# Altium PCB 220,small.PcbDoc
Units mm, origin at the board's own origin, x right, y up, seen from the top; angles counter-clockwise.
Board outline 47.6 x 42.6 mm, 4 copper layers (Top Layer, Internal Plane 1, Internal Plane 2, Bottom Layer); 43 components, 27 nets, 106 pads, 2 vias.
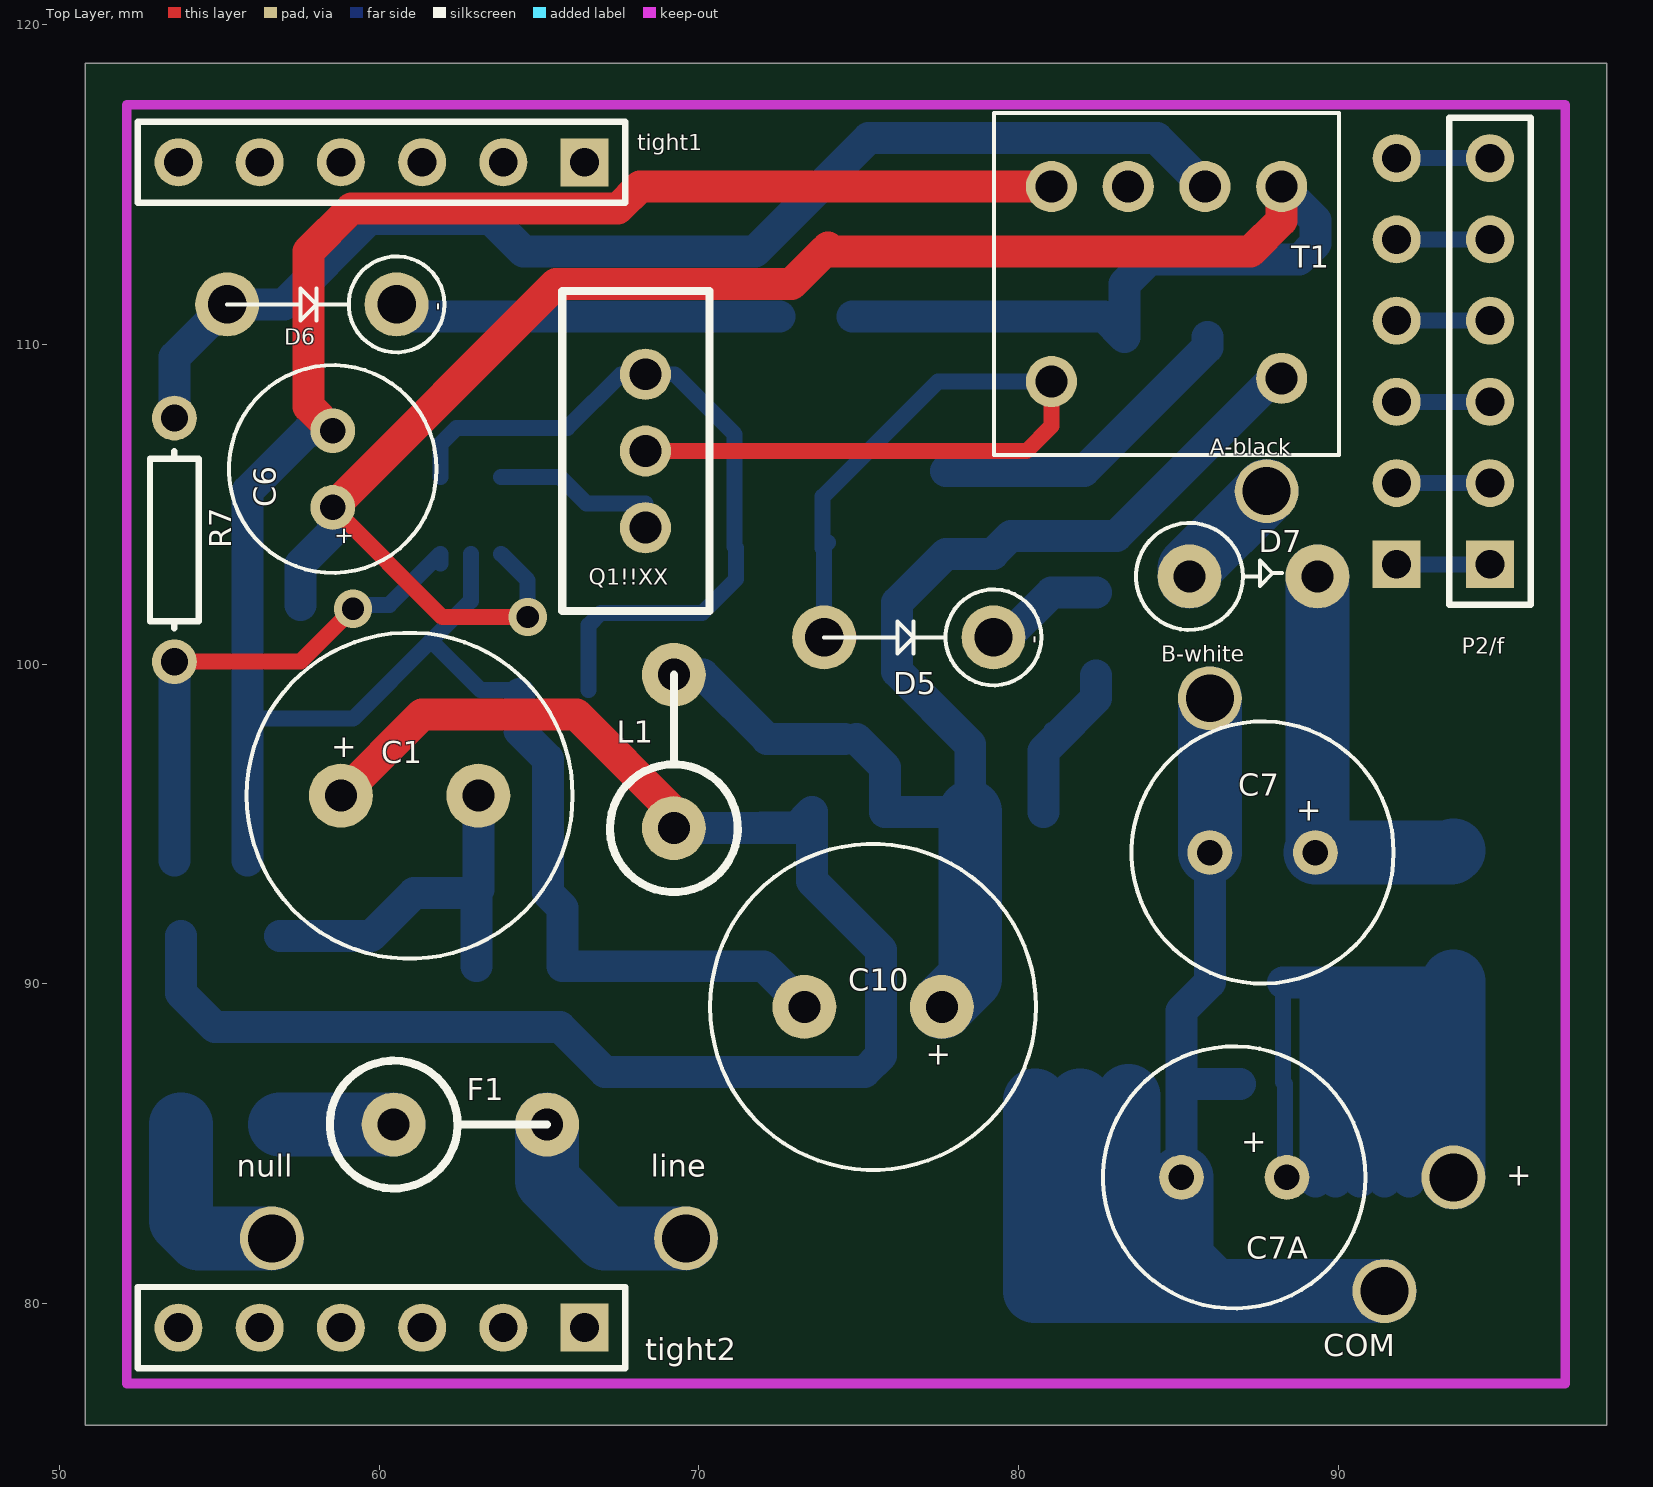
[diagram p0: Top Layer view]
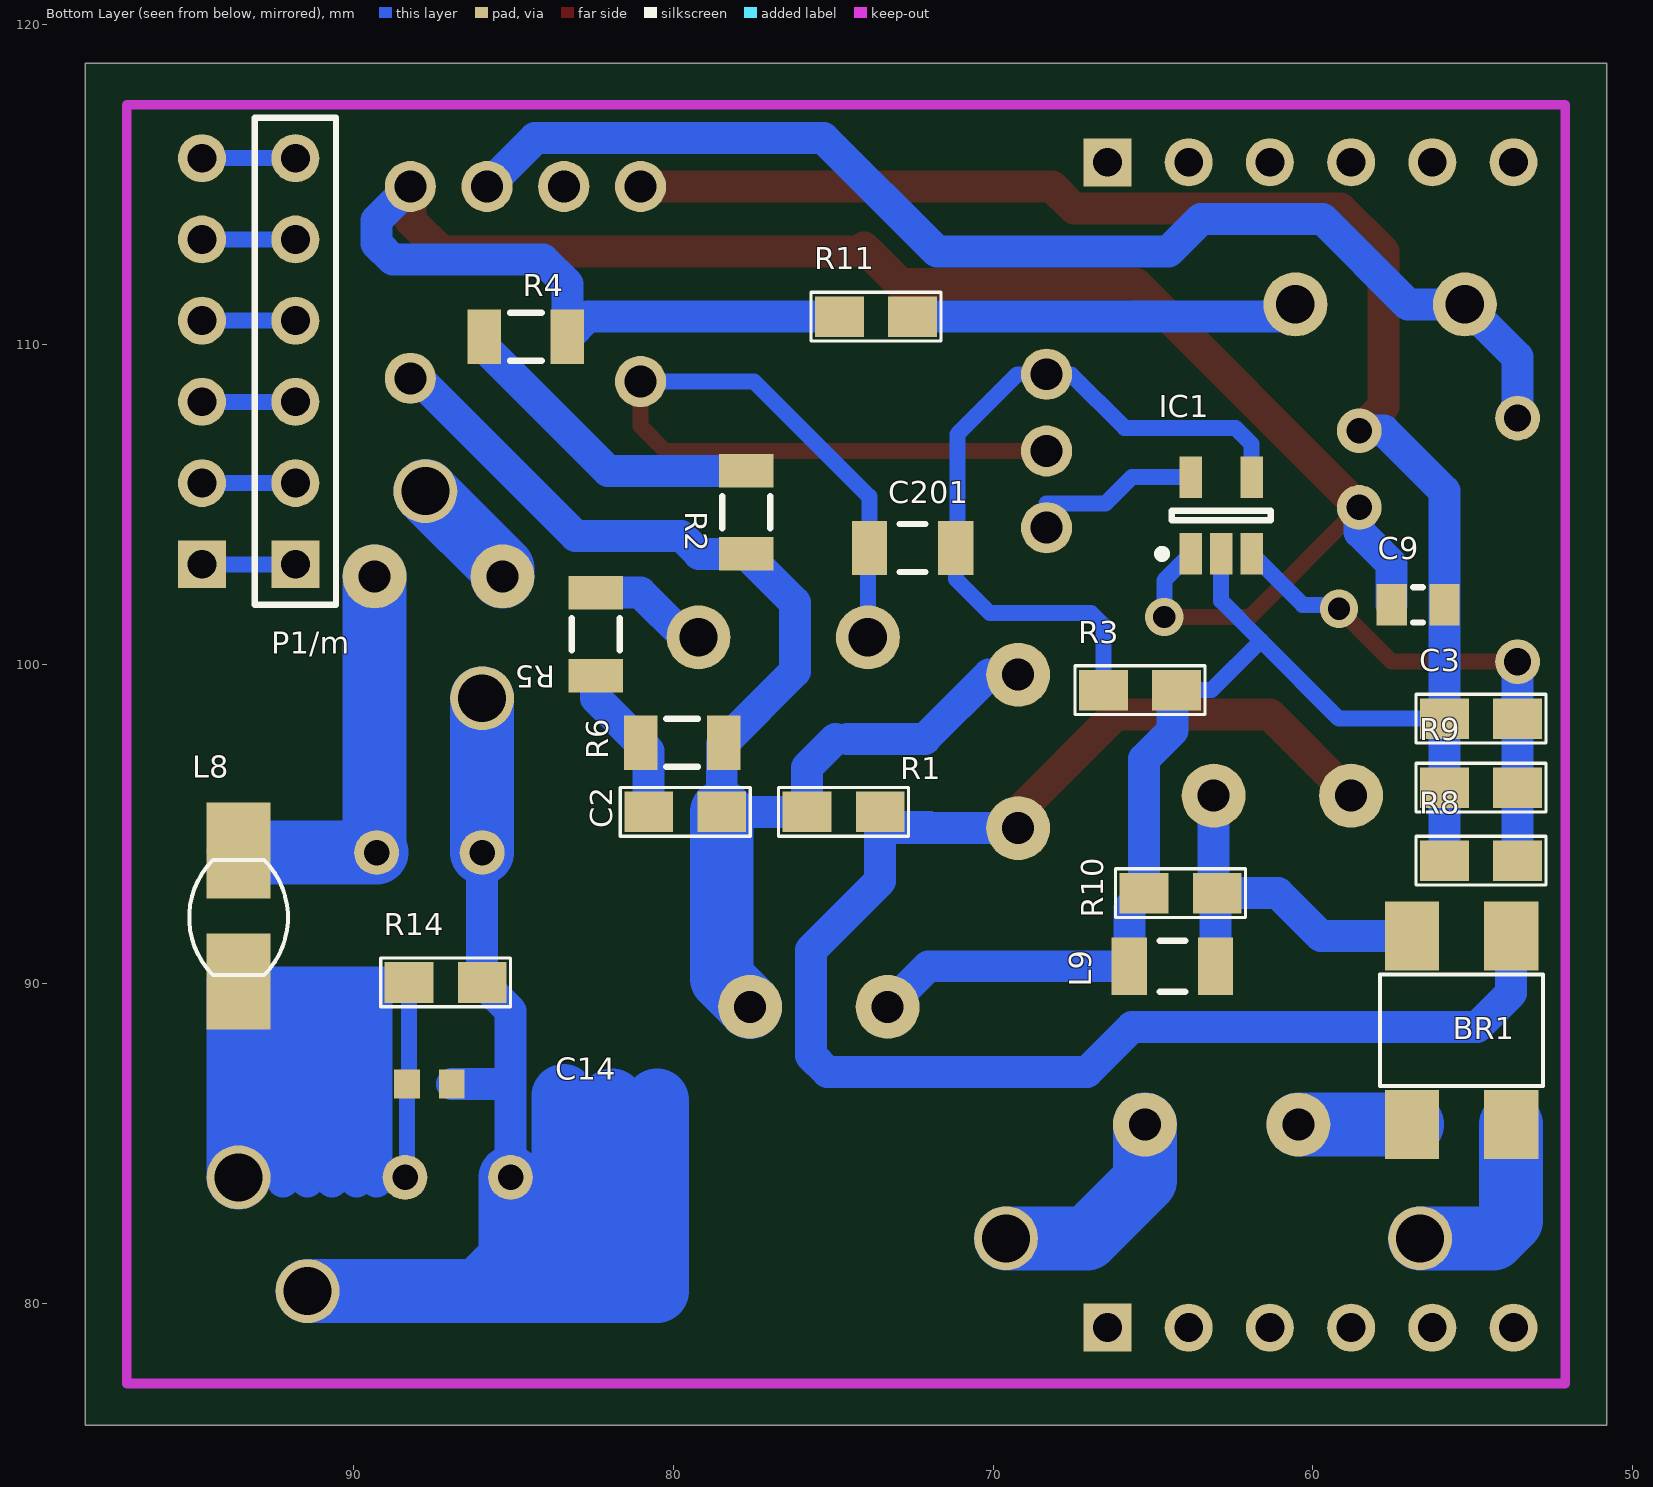
[diagram p1: Bottom Layer view, seen from below]
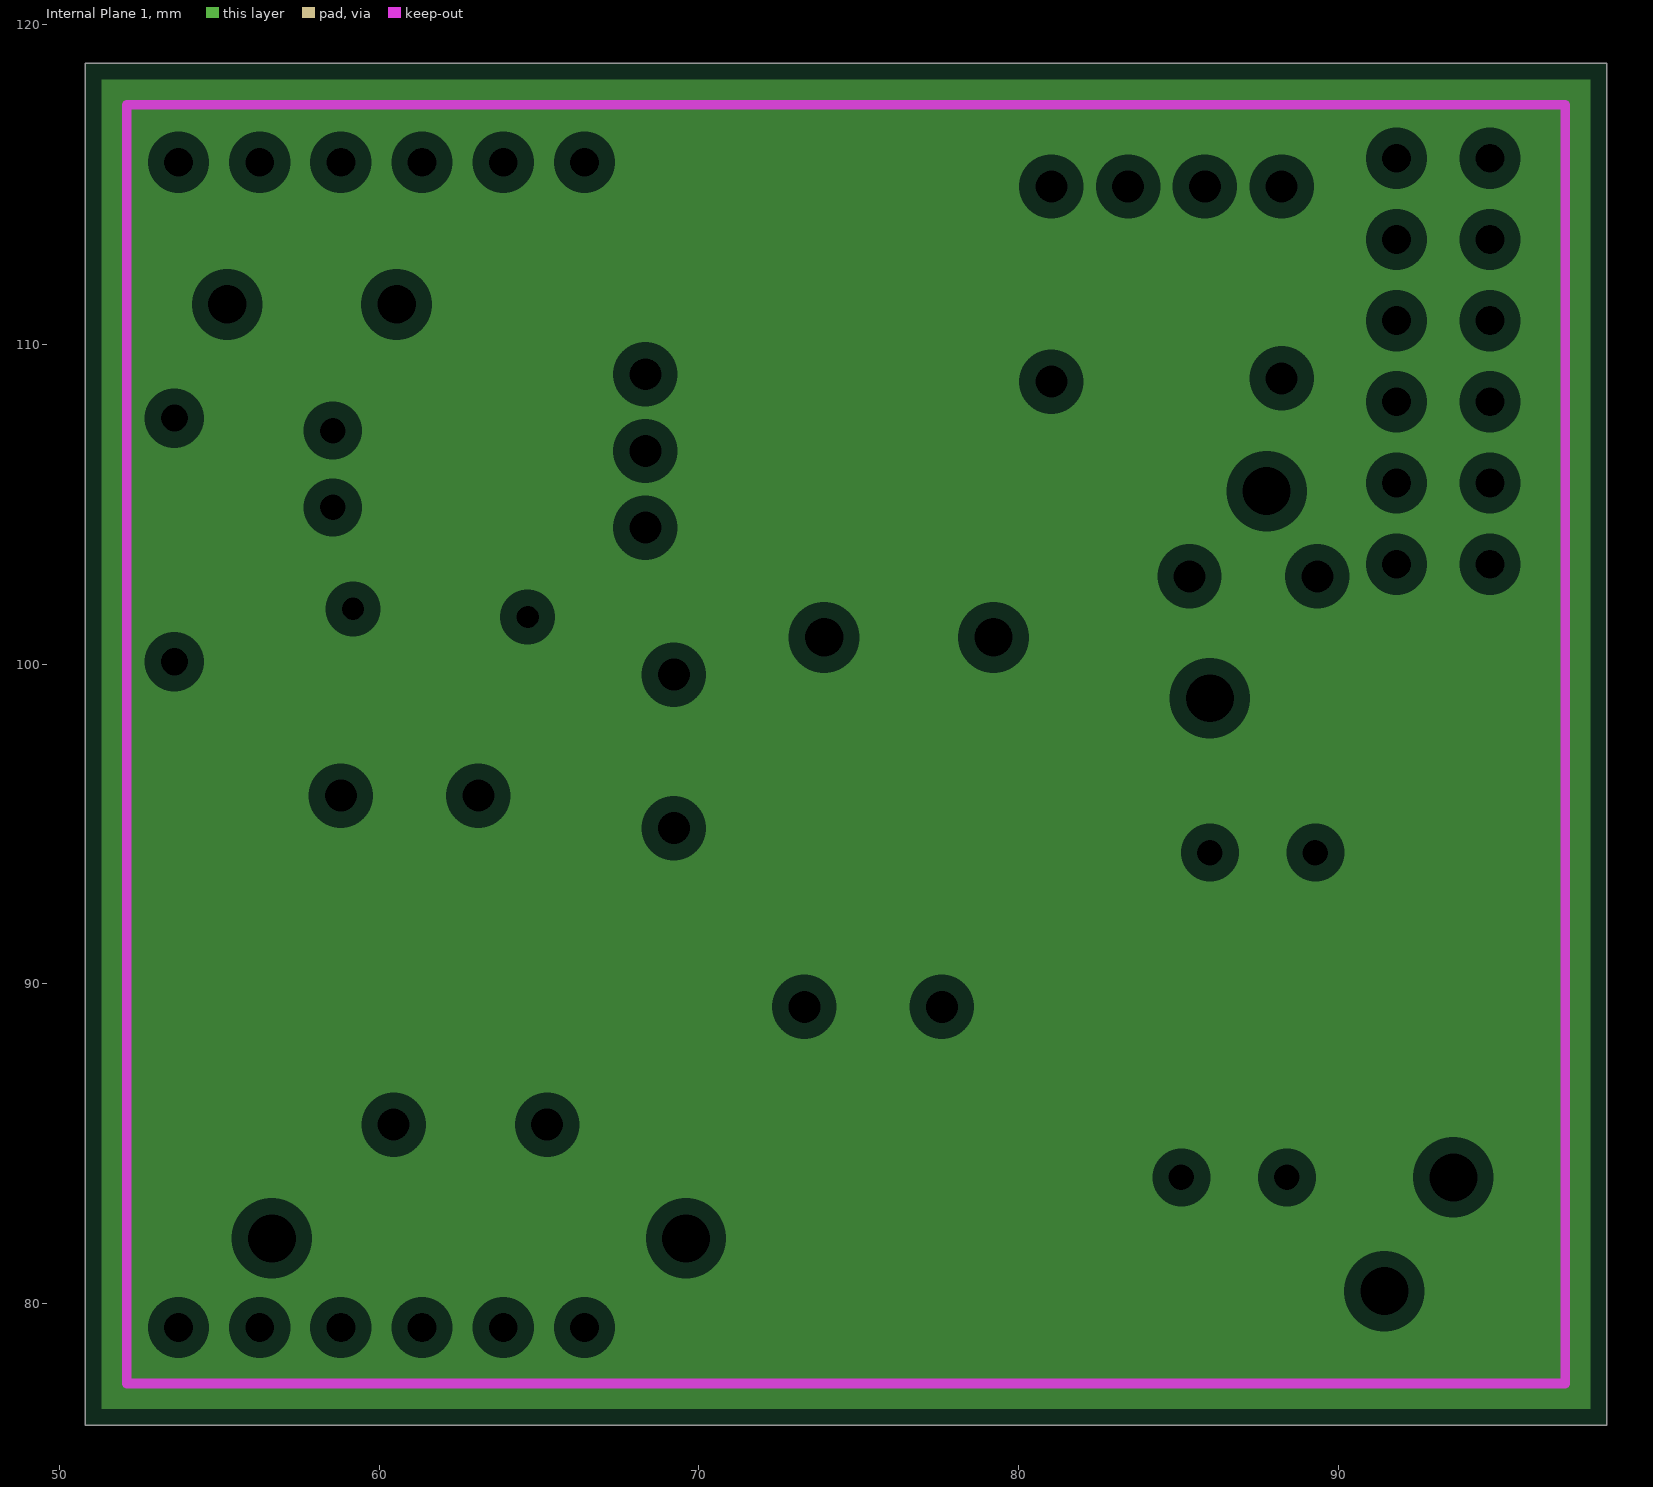
[diagram p2: Internal Plane 1, clearances drawn from the general rule]
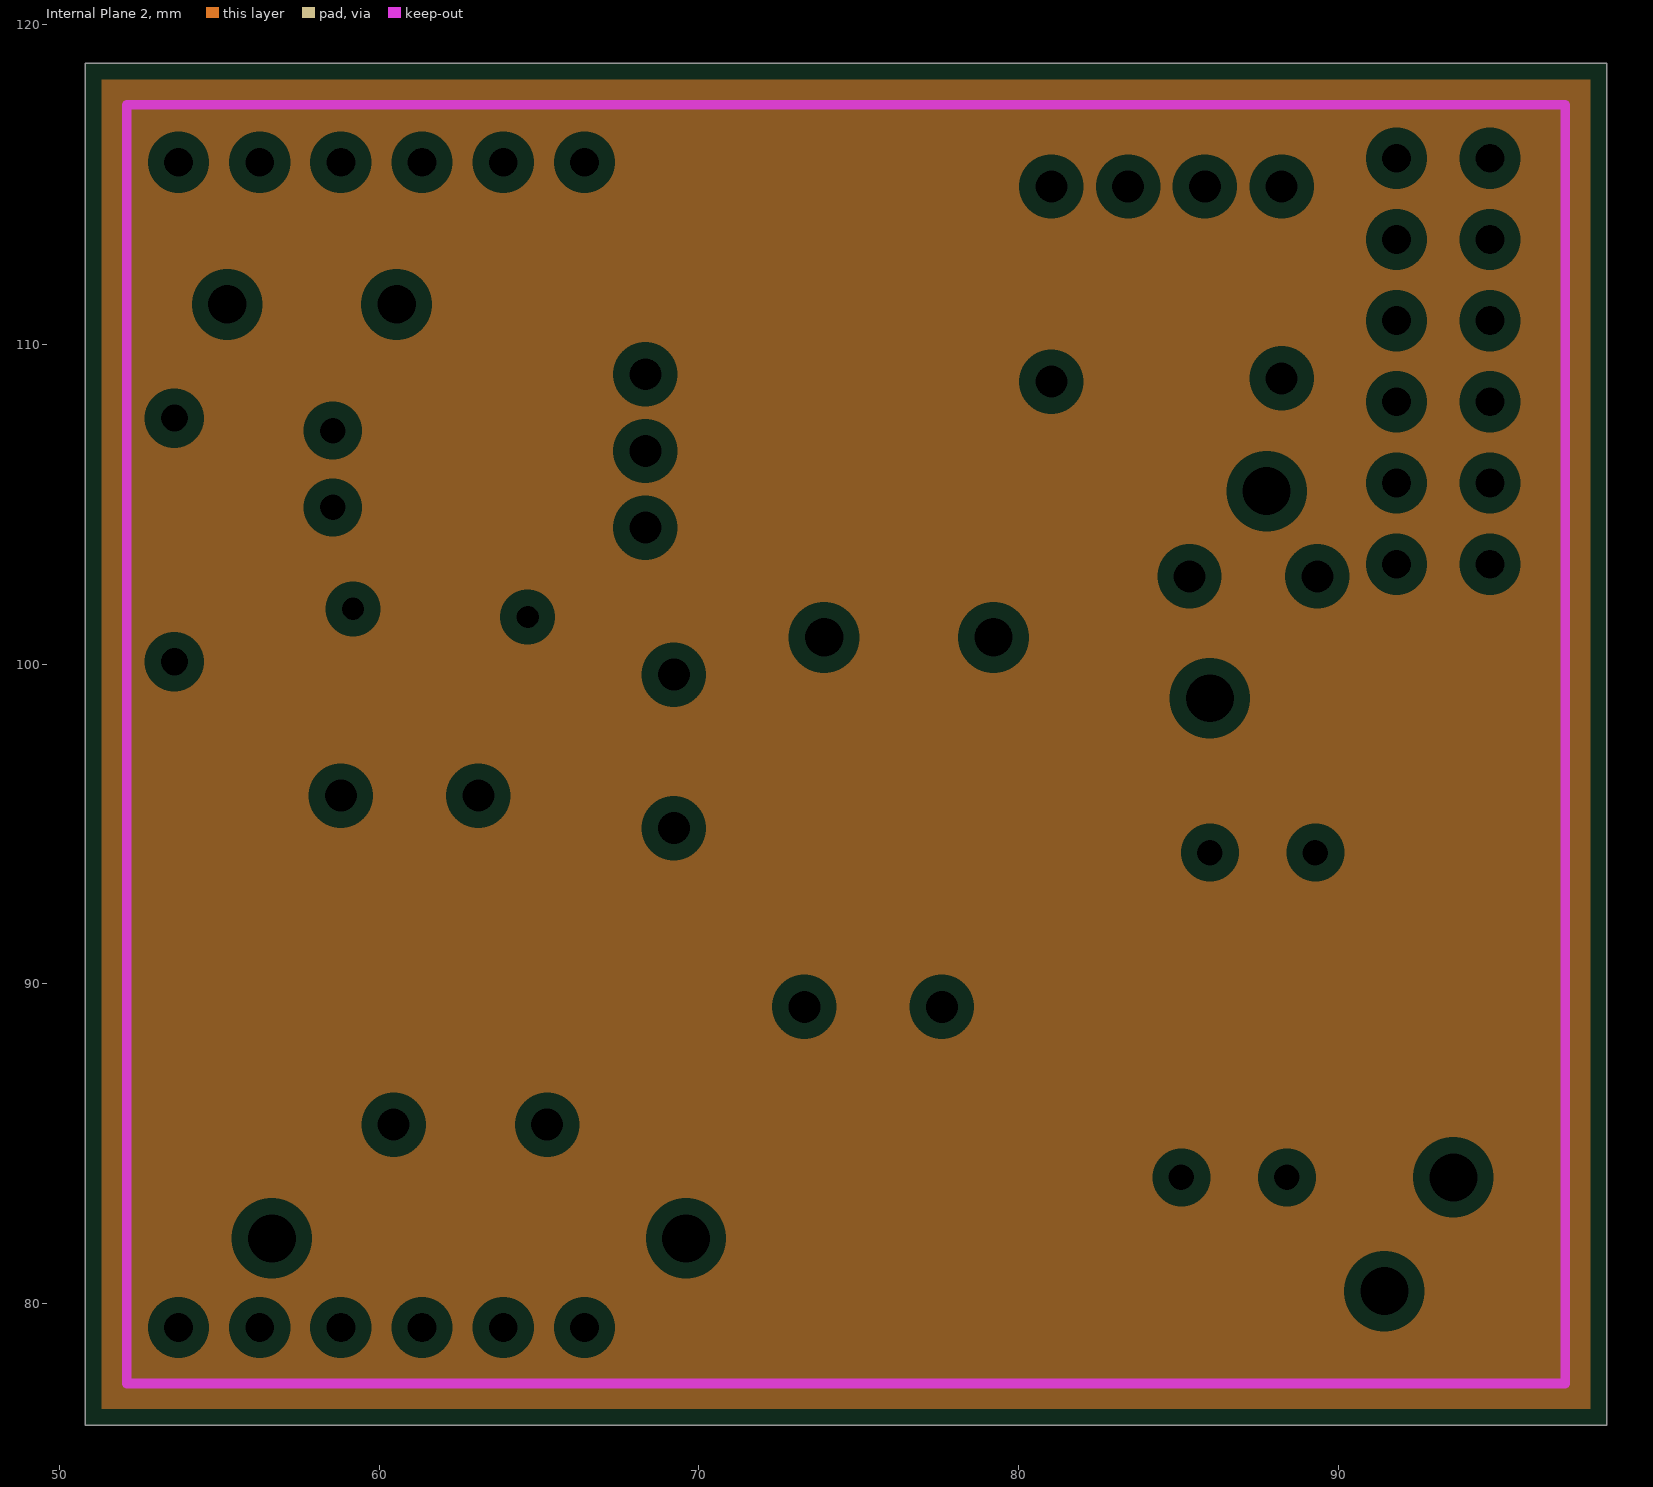
[diagram p3: Internal Plane 2, clearances drawn from the general rule]

## Layer stack, top to bottom
Top Layer: signal copper 0.0356
Dielectric: dielectric 0.32, FR-4, Dk 4.8
Internal Plane 1: plane copper 0.0356
Dielectric: dielectric 0.32, FR-4, Dk 4.8
Internal Plane 2: plane copper 0.0356
Dielectric: dielectric 0.32, FR-4, Dk 4.8
Bottom Layer: signal copper 0.0356

## Board outline
50.8,76.2 98.4,76.2 98.4,118.8 50.8,118.8

## Design rules (kind name [scope] priority, off if disabled: settings)
Clearance [All] p1: gap=0.2
PlaneClearance [All] p1: clearance=0.508
PlaneConnect [All] p1: planeconnectstyle=Relief reliefexpansion=0.508 reliefentries=4 reliefconductorwidth=0.254 reliefairgap=0.254
PolygonConnect [All] p1: connectstyle=Relief reliefconductorwidth=0.254 reliefentries=4 polygonreliefangle="90 Angle"
RoomDefinition 220,small [InComponentClass('220,small')] p1: confinementstyle=ConfineIn formatcopy=TRUE lockcomponents=FALSE outline 0,0 50.8,0 50.8,25.4 0,25.4
RoutingVias [All] p1: holewidth=0.7 width=1.2 viastyle="Through Hole" minholewidth=0.711 minwidth=1.27 maxholewidth=0.711 maxwidth=1.27
SilkscreenOverComponentPads [All] p1: minsilkscreentomaskgap=0.254
SolderMaskExpansion [All] p1: expansion=0.102
Width [All] p1: maxlimit=3 minlimit=0.2 preferedwidth=0.5
25 further rules are at their usual default settings.

## Components (designator, comment, footprint, x,y, rotation, side; value= is the part's Value field where it differs from the comment)
+ "hole-pin" holepin 93.599,83.947 r0 top
A-black "hole-pin" holepin 87.757,105.41 r90 top
B-white "hole-pin" holepin 85.979,98.933 r90 top
BR1 "Bridge" MB108 56.896,85.598 r180 bottom
C1 "15u-400V" 15u-400V 58.801,95.885 r0 top
C2 "CAP" 805 77.597,96.139 r0 bottom
C3 "CAP" 805 56.769,97.536 r180 bottom
C6 "cap-47u-50V" cap47 58.547,104.902 r90 top
C7 "470u-10V" 470u-10V 89.281,94.107 r180 top
C7A "470u-10V" 470u-10V 88.392,83.947 r180 top
C9 "" SMD_CAP_0805 57.531,101.854 r180 bottom
C10 "15u-400V" 15u-400V 77.597,89.281 r180 top
C14 "Cap Semi" 1608[0603] 87.63,86.868 r0 bottom
C201 "Cap Semi" C1206 72.517,103.632 r0 bottom
COM "hole-pin" holepin 91.44,80.391 r0 top
D5 "diode" diode 73.914,100.838 r90 top
D6 "diode" diode 55.245,111.252 r90 top
D7 "Diode" SB340s 85.344,102.743 r0 top
F1 "fuse-R" fuse_r 60.452,85.598 r90 top
IC1 "Ic in sw supply small(1A17?)" SOT23-5AM 62.865,104.648 r90 bottom
L1 "470uH" fuse_r 69.215,94.869 r180 top
L8 "1R0=1uH" self 93.599,92.075 r270 bottom
L9 "Inductor" INDC3216 64.389,90.551 r0 bottom
line "hole-pin" hole-pin 69.596,82.042 r0 top
null "hole-pin" hole-pin 56.642,82.042 r0 top
P1/m "male/micro to 5 v" HDR1X6 91.821,103.124 r90 bottom
P2/f "female/5v to triac" HDR1X6 94.742,103.124 r90 top
Q1!!XX "Q" Q 68.326,104.267 r90 top (schematic designator Q1)
R1 "RES" 805 76.708,94.615 r180 bottom
R2 "155" "RES 1206 (3216X08L)" 77.724,106.045 r270 bottom
R3 "RES" 805 63.373,99.949 r0 bottom
R4 "155" "RES 1206 (3216X08L)" 83.312,110.236 r0 bottom
R5 "681" "RES 1206 (3216X08L)" 82.423,102.235 r270 bottom
R6 "474" "RES 1206 (3216X08L)" 81.026,97.536 r180 bottom
R7 "Res1" AXIAL-0.3 53.594,103.886 r270 top
R8 "RES" 805 52.705,94.615 r0 bottom
R9 "RES" 805 52.705,96.901 r0 bottom
R10 "RES" 805 66.167,92.075 r180 bottom
R11 "RES" 805 71.628,111.633 r0 bottom
R14 "RES" 805 85.09,90.805 r0 bottom
T1 "trans,EE10" trans,EE10 81.026,108.839 r90 top
tight1 "Header 6" HDR1X6 66.421,115.697 r180 top
tight2 "Header 6" HDR1X6 66.421,79.248 r180 top

## Footprints (in the part's own frame and the unit in brackets; to place one, negate y for a bottom-side part, rotate by r counter-clockwise, add the part's x,y. Pads: shape width x height; smd on the part's side, far side on the other; paste and mask are expansions set on the pad)
15u-400V [mm]
  round 2 hole 1: 1(0,0) 2(4.3,0)
  silkscreen extent -2.95,-5.1 7.25,5.1
470u-10V [mm]
  round 1.4 hole 0.8: 1(0,0) 2(3.3,0)
  silkscreen extent -2.45,-4.1 5.75,4.1
805 [mil]
  rect 60x50 smd: 1(125,30) 2(35,30)
  silkscreen extent 0,0 160,60, body extent 0,0 160,60, height 79
1608[0603] [mm] "Chip Capacitor, Body 1.6x0.8mm, IPC High Density"
  rect 0.8x0.9 smd: 1(-0.7,0) 2(0.7,0)
  body extent -0.87,-0.48 0.87,0.48, height 1.3
AXIAL-0.3 [mm] "Axial Device, Thru-Hole; 2 Leads; 0.3 in Pin Spacing"
  round 1.4 hole 0.85: 1(-3.81,0) 2(3.81,0)
  silkscreen extent -2.77,-0.76 2.77,0.76
C1206 [mm] "Chip Capacitor, Body 3.2x1.6mm, IPC High Density"
  rect 1.1x1.7 smd: 1(-1.35,0) 2(1.35,0)
  silkscreen extent -0.4,-0.75 0.4,0.75, body extent -1.7,-0.9 1.7,0.9, height 1.3
cap47 [mm]
  round 1.4 hole 0.8: 1(0,0) 2(2.4,0)
  silkscreen extent -2.05,-3.25 4.45,3.25
diode [mm]
  round 2 hole 1.2: 1(0,0) 2(0,-5.3)
  silkscreen extent -1.5,-6.8 1.5,0
fuse_r [mm]
  round 2 hole 1: 1(0,0) 2(0,-4.8)
  silkscreen extent -2,-4.8 2,2, body extent -1.9,-2 1.9,2, height 12
HDR1X6 [mm] "Connector; Header; 6 Position"
  rect 1.5x1.5 hole 0.9: 1(0,0)
  round 1.5 hole 0.9: 2(2.54,0) 3(5.08,0) 4(7.62,0) 5(10.16,0) 6(12.7,0)
  silkscreen extent -1.27,-1.27 13.97,1.27
hole-pin [mm]
  round 2 hole 1.5: 0(0,0)
holepin [mm]
  round 2 hole 1.5: 0(0,0)
INDC3216 [mm] "Chip Inductor, Body 3.2x1.6mm, IPC High Density"
  rect 1.1x1.8 smd: 1(-1.35,0) 2(1.35,0)
  silkscreen extent -0.4,-0.8 0.4,0.8, body extent -1.7,-0.9 1.7,0.9, height 0.55
MB108 [mm]
  rect 1.7x2.15 smd: 1(0,0) 2(3.1,0) 3(3.1,5.9) 4(0,5.9)
  silkscreen extent -1,1.2 4.1,4.7
Q [mm]
  round 1.6 hole 1: 1(0,0) 2(2.4,0) 3(4.8,0)
  silkscreen extent -2.6,-2 7.4,2.6, body extent -2.6,-2 7.4,2.6, height 15.6
"RES 1206 (3216X08L)" [mm] "Chip Resistor, 2-Leads, Body 3.2x1.6mm, IPC High Density _ (0.125 W)"
  rect 1.05x1.7 smd: 1(0,0) 2(2.596,0)
  silkscreen extent 0.8,-0.75 1.8,0.75, body extent -0.23,-0.76 2.82,0.76, height 0.6
SB340s [mm]
  round 2 hole 1: 1(0,0) 2(4,0)
  silkscreen extent -1.67,-1.67 2.9,1.67
self [mm]
  rect 3x2 smd: 1(-2.1,0) 2(2,0)
  silkscreen extent -1.8,-1.54 1.8,1.54
SMD_CAP_0805 [mm]
  rect 0.95x1.3 smd: 1(0,0) 2(1.65,0)
  silkscreen extent 0.67,-0.55 0.98,0.55, body extent -0.19,-0.64 1.84,0.63, height 0.65
SOT23-5AM [mm] "SOT23, 5-Leads, Body 2.9x1.7mm, Pitch 0.95mm, Lead Span 2.8mm, IPC Low Density"
  rect 1.3x0.7 smd: 1(-1.2,0.95) 2(-1.2,0) 3(-1.2,-0.95) 4(1.2,-0.95) 5(1.2,0.95)
  silkscreen extent -1.32,-1.55 0.15,1.98, body extent -0.9,-1.55 0.9,1.55, height 1.45
trans,EE10 [mm]
  round 1.6 hole 1: 1(0,0) 2(0.1,-7.2) 3(6.1,-7.2) 4(6.1,-4.8) 5(6.1,-2.4) 6(6.1,0)
  silkscreen extent -2.3,-9 8.4,1.8

## Part data
C1 C7 C7A C10: library part "Cap Pol"
C2 C3: library part C
C6: library part cap, "cap-10u-50V"
C9: library part Cap-Bipolar, "Bipolar Capacitor"
C14 C201: "Capacitor (Semiconductor SIM Model)"
D5 D6: "diode istade"
F1 L1: library part fuse, "ohmic fuse"
IC1: library part IC,(1A17?)
L8: library part self
P1/m P2/f: library part "Header 6", "Header, 6-Pin"
R1 R3 R8 R9 R10 R11 R14: library part R
R2 R4 R5 R6: library part Resistor, "Resistor"
R7: "Resistor"
tight1 tight2: "Header, 6-Pin"

## Via types
v1: diameter 1.2, hole 0.7, Top Layer to Bottom Layer, 2 vias

## Nets (pads, with @x,y where several pads share a name; then routed paths per layer and width w, separated by ;. In a path a pad name is that pad's centre, name@x,y a point inside that pad or via, vN(x,y) a via of type N, cw(c..) or ccw(c..) an arc to the next point about the centre after c; other vN are vias at no path point)
+DC: C2.2 C10.1 L1.2 R1.2 R2.2 R6.2 T1.2 | length 40.8
  Bottom Layer w0.5: 74.549,97.663 74.93,97.663 ; R6.2 R6.2@78.486,97.48
  Bottom Layer w1: L1.2 70.13,99.669 72.136,97.663 74.549,97.663 ; 74.93,97.663 75.819,96.774 R1.2 C2.2 R6.2@78.486,97.48 ; R6.2 76.2,99.766 76.2,101.925 R2.2 79.192,103.449 79.756,104.013 83.058,104.013 87.984,108.939 T1.2
  Bottom Layer w2: C10.1 78.486,90.17 C2.2
-DC: C3.2 C6.2 C9.2 C10.2 IC1.2 L9.2 R3.2 R8.1 R9.1 R10.2 T1.6 | length 76.1
  Top Layer w1: C6.2 57.785,108.064 57.785,112.903 59.129,114.247 67.461,114.247 68.153,114.939 T1.6
  Bottom Layer w0.5: C3.2 59.182,98.298 61.62,100.736 ; C9.2 C9.2 55.881,101.194 ; IC1.2 62.865,101.981 61.62,100.736 ; R3.2 63.17,99.187 61.62,100.736
  Bottom Layer w1: R8.1 R9.1 C3.2 C9.2 55.88,105.41 57.772,107.302 C6.2 ; R3.2@64.389,99.06 64.389,97.917 65.278,97.028 R10.2 65.739,92.376 L9.2 72.027,90.551 C10.2
GND: B-white.0 C7.2 C7A.2 C14.1 COM.0 R14.2 | length 49.2
  Bottom Layer w0: C7.2@85.979,94.105 C7.2
  Bottom Layer w1: C7A.2 85.092,86.995 ; C7.2@85.979,94.105 R14.2 85.092,89.156 85.092,86.995 ; C14.1 85.219,86.868 85.092,86.995
  Bottom Layer w2: 80.518,86.36 80.518,80.391 83.439,80.391 ; 81.915,81.407 81.915,86.36 ; 83.439,86.487 83.439,80.391 ; 85.09,81.407 85.092,81.409 ; C7A.2 85.092,81.409 ; B-white.0 85.981,98.931 C7.2 ; COM.0 86.11,80.391 ; 83.439,80.391 86.11,80.391 ; 85.092,81.409 86.11,80.391
LINE: F1.2 line.0 | length 6.8
  Bottom Layer w2: F1.2 65.252,83.846 67.056,82.042 line.0
NetA-black_0: A-black.0 D7.1 | length 3.7
  Bottom Layer w2: D7.1 85.344,102.997 A-black.0
NetBR1_1: BR1.1 F1.1 | length 3.6
  Bottom Layer w2: BR1.1 F1.1
NetBR1_3: BR1.3 C1.1 L1.1 R1.1 | length 52.8
  Top Layer w1: C1.1 61.341,98.425 66.167,98.425 69.215,95.377 L1.1
  Bottom Layer w0: 71.882,95.377 R1.1
  Bottom Layer w1: BR1.3 53.796,89.713 54.863,88.646 65.659,88.646 67.056,87.249 75.184,87.249 75.692,87.757 75.692,91.059 73.533,93.218 R1.1 73.025,94.869 L1.1
NetBR1_4: BR1.4 C1.2 L9.1 R10.1 | length 12.1
  Bottom Layer w0.5: BR1.4 BR1.4@56.896,91.567 ; R10.1@63.039,92.79 R10.1 R10.1@63.101,92.946
  Bottom Layer w1: BR1.4 59.748,91.498 61.087,92.837 R10.1 ; L9.1 R10.1@63.039,92.79 ; R10.1@63.101,92.946 C1.2
NetC2_1: C2.1 R5.2 R6.1 | length 5.4
  Bottom Layer w0.5: R6.1 R6.1@81.026,97.942
  Bottom Layer w1: C2.1 80.772,97.282 R6.1 82.423,98.933 R5.2
NetC3_1: C3.1 IC1.3 R7.2 R8.2 R9.2 | length 16.2
  Top Layer w0.5: R7.2 57.531,100.076 v1(59.182,101.727)
  Bottom Layer w0.5: v1@59.182,101.976 59.304,101.854 60.321,101.854 IC1.3 IC1.3@61.915,103.149
  Bottom Layer w1: R8.2 R9.2 C3.1 R7.2
NetC6_1: C6.1 C9.1 IC1.1 R4.1 R11.1 T1.3 | length 67.1
  Top Layer w0.5: C6.1 61.976,101.473 v1(64.643,101.473)
  Top Layer w1: C6.1 65.532,111.887 72.898,111.887 73.914,112.903 ; 74.041,113.03 73.914,112.903 ; T1.3 88.226,113.88 87.249,112.903 73.914,112.903
  Bottom Layer w0.5: IC1.1 64.643,102.62 v1(64.643,101.473)
  Bottom Layer w1: C9.1 57.531,103.124 58.547,104.14 C6.1 ; R11.1 82.677,110.871 R4.1 83.312,111.887 84.074,112.649 88.773,112.649 89.281,113.157 89.281,113.884 T1.3
NetC7_1: C7.1 D7.2 L8.1 | length 13
  Bottom Layer w2: D7.2 89.344,94.17 C7.1 93.531,94.107 L8.1
NetC201_1: C201.1 IC1.4 Q1!!XX.3 R3.1 | length 23.7
  Bottom Layer w0.5: IC1.4 61.915,106.883 62.423,107.391 65.888,107.391 67.564,109.067 Q1!!XX.3 69.241,109.067 71.12,107.188 71.12,103.679 C201.1 71.167,102.663 70.104,101.6 66.929,101.6 66.548,101.219 R3.1
NetD5_2: D5.2 R5.1 | length 3.8
  Bottom Layer w0.5: D5.2 D5.2@79.629,100.838
  Bottom Layer w1: D5.2@79.629,100.838 81.026,102.235 R5.1
NetD6_1: D6.1 R7.1 T1.4 | length 38.5
  Bottom Layer w1: R7.1 53.594,109.601 D6.1 57.023,111.252 59.69,113.919 63.5,113.919 64.516,112.903 71.755,112.903 75.311,116.459 84.328,116.459 84.328,116.437 T1.4
NetD6_2: D6.2 R11.2 | length 12.1
  Bottom Layer w1: D6.2 60.926,110.871 R11.2
NetIC1_5: IC1.5 Q1!!XX.1 | length 4.9
  Bottom Layer w0.5: IC1.5 65.659,105.848 66.478,105.029 Q1!!XX.1@68.326,105.029
NetP1/m_1: P1/m.1 P2/f.1 | length 2.9
  Bottom Layer w0.5: P1/m.1 P2/f.1
NetP1/m_2: P1/m.2 P2/f.2 | length 2.9
  Bottom Layer w0.5: P1/m.2 P2/f.2
NetP1/m_3: P1/m.3 P2/f.3 | length 2.9
  Bottom Layer w0.5: P1/m.3 P2/f.3
NetP1/m_4: P1/m.4 P2/f.4 | length 2.9
  Bottom Layer w0.5: P1/m.4 P2/f.4
NetP1/m_5: P1/m.5 P2/f.5 | length 2.9
  Bottom Layer w0.5: P1/m.5 P2/f.5
NetP1/m_6: P1/m.6 P2/f.6 | length 2.9
  Bottom Layer w0.5: P1/m.6 P2/f.6
NetR2_1: R2.1 R4.2 | length 10.1
  Bottom Layer w1: R2.1 82.042,106.045 85.908,109.911 R4.2
NULL: BR1.2 null.0 | length 6.1
  Bottom Layer w2: BR1.2 53.796,82.602 54.356,82.042 null.0
T1-1: C201.2 D5.1 Q1!!XX.2 T1.1 | length 28.2
  Top Layer w0.5: Q1!!XX.2 80.251,106.667 81.026,107.442 T1.1
  Top Layer w1: D5.1 D5.1@74.422,100.838
  Bottom Layer w0.5: D5.1 73.914,103.585 C201.2 ; C201.2@74.041,103.806 C201.2 ; T1.1 77.47,108.839 73.867,105.236 C201.2
VCC: +.0 C7A.1 C14.2 L8.2 R14.1 | length 48.8
  Bottom Layer w0.5: R14.1@88.33,89.978 R14.1 88.265,86.933 C14.2 88.33,84.009 C7A.1
  Bottom Layer w1: R14.1 89.281,90.043 ; 89.281,83.82 89.281,90.043 ; 89.916,83.82 89.916,90.043 ; 90.678,83.82 90.678,90.043 ; 91.44,83.82 91.44,90.043 ; 92.202,83.82 92.202,90.043 ; L8.2 93.567,90.043 92.202,90.043 ; 89.281,90.043 89.916,90.043 ; 89.916,90.043 90.678,90.043 ; 90.678,90.043 91.44,90.043 ; 91.44,90.043 92.202,90.043
  Bottom Layer w2: +.0 L8.2
pads on no net: T1.5 tight1.1 tight1.2 tight1.3 tight1.4 tight1.5 tight1.6 tight2.1 tight2.2 tight2.3 tight2.4 tight2.5 tight2.6

## Polygon pours and split planes (outlines as drawn)
no net on Internal Plane 1 (split plane): 97.89,76.71 51.31,76.71 51.31,118.29 97.89,118.29
no net on Internal Plane 2 (split plane): 97.89,76.71 51.31,76.71 51.31,118.29 97.89,118.29

## Keep-outs
Keep-Out Layer:
  lines w0.3: 52.1,77.5 52.1,117.5 97.1,117.5 97.1,77.5 52.1,77.5

## Dimensions
52.1,77.5 to 52.1,117.5 on Mechanical 1
52.1,77.5 to 97.1,77.5 on Mechanical 1

## Text inside footprints (layer, text, board x,y; h text height)
C1: Top Overlay "+" at 58.501,97.085 h0.7
C6: Top Overlay "+" at 59.147,103.702 h0.52 r90
C7: Top Overlay "+" at 89.481,95.707 h0.7 r180
C7A: Top Overlay "+" at 87.757,85.344 h0.7 r180
C10: Top Overlay "+" at 77.897,88.081 h0.7 r180
D5: Top Overlay "-" at 80.714,100.638 h0.52 r90
D6: Top Overlay "-" at 62.045,111.052 h0.52 r90